# Altium PCB PCB-NW0101 Rev.D.PcbDoc (part 2 of 3)
Units mm, origin at the board's own origin, x right, y up, seen from the top; angles counter-clockwise.
Board outline 20 x 35 mm, 6 copper layers (Top, GND, Inner3, Inner4, PWR, Bottom), stack 0.74 mm thick; 118 components, 125 nets, 559 pads, 474 vias.
Unrouted connection lines stored in the file: 214.
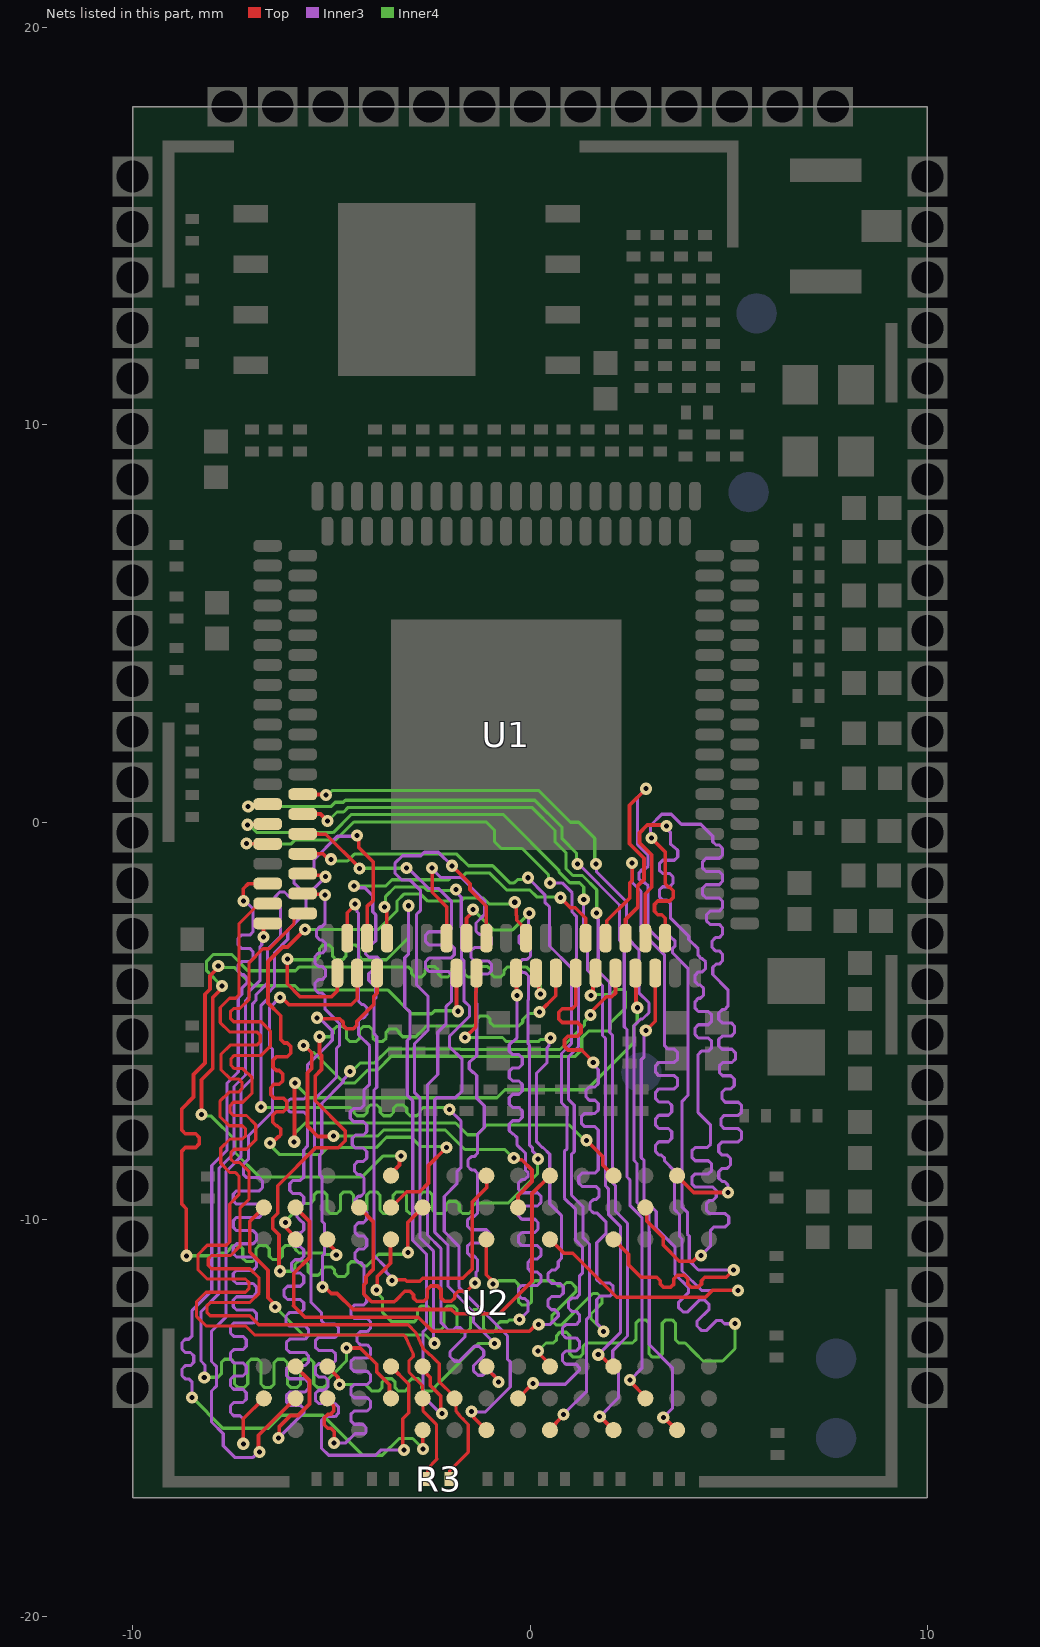
[diagram p6: the nets of this part, all layers, seen from the top]

## Via types
v1: diameter 0.305/0.305/0.305/0.305 (per signal layer), hole 0.127, Top to Bottom, tented both sides, 474 vias

## Nets (pads, with @x,y where several pads share a name; then routed paths per layer and width w, separated by ;. In a path a pad name is that pad's centre, name@x,y a point inside that pad or via, vN(x,y) a via of type N, cw(c..) or ccw(c..) an arc to the next point about the centre after c; other vN are vias at no path point) (continued)
DDR_A4: U1.82 U2.N8 | length 23
  Top w0.092: U2.N8@-5.1,-14.5 -5.1,-14.524 -5.1,-14.535 -4.939,-14.696 -4.939,-14.822 -5.022,-14.905 -5.092,-14.905 -5.178,-14.992 -5.178,-15.165 -5.092,-15.252 -5.011,-15.252 -4.924,-15.338 -4.924,-15.384 -4.924,-15.612 v1(-4.933,-15.621) ; U1.82@-4.6,-2.92 -4.6,-2.282 -4.402,-2.083 v1(-4.402,-2.068)
  Inner3 w0.079: v1(-4.933,-15.621) -4.633,-15.621 -4.405,-15.392 -4.166,-15.392 -4.126,-15.353 -4.126,-15.235 -4.209,-15.152 -4.426,-15.152 -4.509,-15.069 -4.509,-14.903 -4.426,-14.819 -4.099,-14.819 -4.016,-14.736 -4.016,-14.57 -4.099,-14.487 -4.426,-14.487 -4.509,-14.403 -4.509,-14.237 -4.426,-14.154 -4.099,-14.154 -4.016,-14.071 -4.016,-13.904 -4.099,-13.821 -4.426,-13.821 -4.509,-13.738 -4.509,-13.571 -4.426,-13.488 -4.099,-13.488 -4.016,-13.405 -4.016,-13.239 -4.099,-13.155 -4.272,-13.155 -4.355,-13.072 -4.355,-12.906 -4.272,-12.823 -4.099,-12.823 -4.016,-12.74 -4.016,-12.573 -4.099,-12.49 -4.426,-12.49 -4.509,-12.407 -4.509,-12.24 -4.426,-12.157 -4.191,-12.157 -4.108,-12.074 -4.108,-11.963 -4.18,-11.892 -4.18,-11.203 -4.18,-11.163 -4.263,-11.08 -4.319,-11.08 -4.403,-10.997 -4.403,-10.831 -4.319,-10.747 -4.191,-10.747 -4.108,-10.664 -4.108,-10.498 -4.191,-10.415 -4.319,-10.415 -4.403,-10.331 -4.403,-10.165 -4.319,-10.082 -4.191,-10.082 -4.108,-9.999 -4.108,-9.832 -4.191,-9.749 -4.319,-9.749 -4.403,-9.666 -4.403,-9.499 -4.319,-9.416 -4.263,-9.416 -4.18,-9.333 -4.18,-9.1 -4.18,-8.995 -4.18,-8.956 -4.263,-8.872 -4.334,-8.872 -4.417,-8.789 -4.417,-8.623 -4.334,-8.54 -4.191,-8.54 -4.108,-8.456 -4.108,-8.29 -4.191,-8.207 -4.392,-8.207 -4.475,-8.124 -4.475,-7.957 -4.392,-7.874 -4.191,-7.874 -4.108,-7.791 -4.108,-7.625 -4.191,-7.541 -4.44,-7.541 -4.524,-7.458 -4.524,-7.292 -4.44,-7.209 -4.263,-7.209 -4.18,-7.125 -4.18,-6.898 -4.18,-6.74 -4.038,-6.598 -4.038,-5.631 -4.29,-5.379 -4.317,-5.352 -4.317,-5.007 -4.234,-4.924 -4.187,-4.924 -4.104,-4.841 -4.104,-4.674 -4.187,-4.591 -4.234,-4.591 -4.317,-4.508 -4.317,-3.356 -4.317,-2.288 -4.359,-2.247 -4.359,-2.111 v1(-4.402,-2.068)
DDR_A5: U1.93 U2.N3 | length 21.6
  Top w0.092: v1(-8.649,-10.915) -8.649,-9.73 -8.76,-9.618 -8.76,-8.669 -8.76,-8.276 -8.674,-8.19 -8.414,-8.19 -8.327,-8.103 -8.327,-7.93 -8.414,-7.843 -8.674,-7.843 -8.76,-7.757 -8.76,-7.579 -8.76,-7.213 -8.469,-6.922 -8.469,-6.353 -8.177,-6.062 -8.177,-4.336 -8.052,-4.211 -8.052,-3.866 -7.845,-3.659 v1(-7.845,-3.624) ; U2.N3@-5.082,-10.49 -5.082,-10.603 -4.917,-10.768 -4.917,-10.859 v1(-4.876,-10.9) ; U1.93@-1.85,-3.8 -1.85,-4.729 v1(-1.817,-4.762)
  Inner4 w0.078: v1(-8.649,-10.915) -7.892,-10.915 -7.823,-10.846 -7.683,-10.846 -7.644,-10.846 -7.56,-10.763 -7.56,-10.737 -7.477,-10.654 -7.311,-10.654 -7.228,-10.737 -7.228,-10.975 -7.145,-11.058 -6.979,-11.058 -6.896,-10.975 -6.896,-10.737 -6.813,-10.654 -6.646,-10.654 -6.563,-10.737 -6.563,-10.927 -6.48,-11.01 -6.314,-11.01 -6.231,-10.927 -6.231,-10.737 -6.148,-10.654 -5.982,-10.654 -5.898,-10.737 -5.898,-10.763 -5.815,-10.846 -5.773,-10.846 -5.186,-10.846 -5.146,-10.885 -4.891,-10.885 v1(-4.876,-10.9) ; v1(-7.845,-3.624) -7.811,-3.658 -7.439,-3.658 -6.976,-4.12 -5.913,-4.12 -5.803,-4.231 -3.57,-4.231 -3.276,-4.525 -3.276,-4.531 -2.981,-4.825 -2.475,-4.825 -2.398,-4.748 -1.831,-4.748 v1(-1.817,-4.762)
DDR_A6: U1.86 U2.N7 | length 22
  Top w0.092: U2.N7@-5.095,-13.706 -5.094,-13.706 -4.831,-13.969 -4.831,-14.113 v1(-4.79,-14.154) ; v1(-3.665,-2.14) -3.665,-2.197 -3.607,-2.255 -3.607,-2.913 U1.86@-3.6,-2.92
  Inner3 w0.079: v1(-1.862,-1.698) -1.862,-1.759 -1.73,-1.891 -1.73,-2.658 -1.727,-2.661 -1.727,-3.428 -1.665,-3.49 -1.665,-4.499 -1.524,-4.64 -1.524,-4.891 -2.03,-5.397 -2.03,-5.648 -1.709,-5.97 -1.709,-6.77 -1.878,-6.939 -2.35,-6.939 -2.399,-6.988 -2.399,-10.318 -2.065,-10.653 -2.065,-11.685 -1.422,-12.327 -1.422,-12.589 v1(-0.889,-13.123)
  Inner4 w0.078: v1(-4.79,-14.154) -4.514,-14.154 -4.142,-14.154 -4.059,-14.237 ; -4.059,-14.238 -3.976,-14.321 -3.81,-14.321 -3.727,-14.238 -3.727,-14.093 -3.644,-14.01 -3.478,-14.01 -3.394,-14.093 -3.394,-14.238 -3.311,-14.321 -3.145,-14.321 -3.062,-14.238 -3.062,-14.093 -2.979,-14.01 -2.813,-14.01 -2.73,-14.093 -2.73,-14.238 -2.647,-14.321 -2.48,-14.321 -2.397,-14.238 -2.397,-14.216 -2.213,-14.032 -1.304,-13.123 v1(-0.889,-13.123) ; v1(-3.665,-2.14) -3.635,-2.109 -3.635,-1.87 -3.399,-1.634 -2.673,-1.634 -2.583,-1.724 -1.888,-1.724 v1(-1.862,-1.698)
DDR_A7: U1.95 U2.P2 | length 22.2
  Top w0.092: -5.951,-12.174 -5.663,-12.462 -2.81,-12.462 -2.456,-12.816 -0.016,-12.816 0.16,-12.64 v1(0.218,-12.64) ; -5.944,-12.167 -5.944,-11.352 -5.549,-10.957 -5.549,-10.051 U2.P2@-5.9,-9.7 ; v1(-1.634,-5.424) -1.366,-5.155 -1.366,-4.267 -1.35,-4.251 U1.95@-1.35,-3.8
  Inner3 w0.079: v1(0.218,-12.64) 0.508,-12.64 0.71,-12.437 0.71,-12.395 0.71,-12.356 0.627,-12.273 0.539,-12.273 0.456,-12.19 0.456,-12.023 0.539,-11.94 0.753,-11.94 0.836,-11.857 0.836,-11.69 0.753,-11.607 0.539,-11.607 0.456,-11.524 0.456,-11.358 0.539,-11.274 0.627,-11.274 0.71,-11.191 0.71,-11.15 0.71,-11.062 0.787,-10.984 0.787,-9.898 0.497,-9.608 0.497,-8.361 0.325,-8.189 0.305,-8.189 0.165,-8.049 0.165,-6.316 0.43,-6.05 0.43,-5.676 0.473,-5.634 0.473,-5.474 v1(0.516,-5.431)
  Inner4 w0.078: v1(-1.634,-5.424) -0.694,-5.424 -0.592,-5.526 0.207,-5.526 0.259,-5.474 0.473,-5.474 v1(0.516,-5.431)
DDR_A8: U1.84 U2.P8 | length 24
  Top w0.092: v1(-6.809,-15.854) -6.833,-15.831 -6.833,-15.433 -5.918,-14.518 U2.P8@-5.918,-14.478 ; v1(-4.353,-0.335) -4.313,-0.376 -4.313,-0.64 -3.946,-1.007 -3.946,-1.973 -4.1,-2.127 U1.84@-4.1,-2.92
  Inner3 w0.079: v1(-6.809,-15.854) -6.836,-15.854 -6.968,-15.986 -7.433,-15.986 -7.72,-15.699 -7.72,-15.392 -8.015,-15.097 -8.015,-14.316 -7.885,-14.187 -7.885,-13.703 -8.015,-13.573 -8.015,-12.812 -7.648,-12.445 -7.648,-8.793 -7.268,-8.414 -7.268,-6.729 -6.98,-6.44 -6.98,-4.571 -6.895,-4.486 -6.895,-4.345 -6.61,-4.06 -6.61,-3.208 -6.277,-2.875 -6.277,-2.308 -6.277,-2.134 -6.414,-1.997 -6.414,-1.88 -6.297,-1.762 -6.179,-1.762 -6.049,-1.892 -5.932,-1.892 -5.814,-1.774 -5.814,-1.657 -5.944,-1.527 -5.944,-1.409 -5.826,-1.291 -5.709,-1.291 -5.604,-1.396 -5.486,-1.396 -5.436,-1.346 -5.436,-0.946 -4.848,-0.359 -4.377,-0.359 v1(-4.353,-0.335)
DDR_A9: U1.94 U2.P3 | length 21.9
  Top w0.092: -6.118,-10.234 -5.918,-10.434 U2.P3@-5.918,-10.49 ; U1.94@-1.6,-2.92 -1.6,-2.422 -1.437,-2.258 v1(-1.437,-2.205)
  Inner3 w0.079: v1(-0.02,-2.295) -0.039,-2.314 -0.039,-2.591 -0.039,-2.708 -0.122,-2.792 -0.187,-2.792 -0.27,-2.875 -0.27,-3.041 -0.187,-3.124 -0.073,-3.124 0.01,-3.208 0.01,-3.374 -0.073,-3.457 -0.187,-3.457 -0.27,-3.54 -0.27,-3.707 -0.187,-3.79 -0.122,-3.79 -0.039,-3.873 -0.039,-3.913 -0.039,-4.482 -0.056,-4.499 -0.056,-5.566 -0.016,-5.606 -0.016,-8.124 0.065,-8.205 0.065,-8.283 0.203,-8.421 v1(0.203,-8.483)
  Inner4 w0.078: v1(-6.158,-10.079) -6.158,-10.044 -5.709,-9.595 -5.561,-9.595 -5.522,-9.595 -5.439,-9.512 -5.439,-9.389 -5.356,-9.306 -5.189,-9.306 -5.106,-9.389 -5.106,-9.766 -5.023,-9.849 -4.857,-9.849 -4.774,-9.766 -4.774,-9.389 -4.691,-9.306 -4.525,-9.306 -4.442,-9.389 -4.442,-9.766 -4.358,-9.849 -4.192,-9.849 -4.109,-9.766 -4.109,-9.389 -4.026,-9.306 -3.86,-9.306 -3.777,-9.389 -3.777,-9.766 -3.694,-9.849 -3.527,-9.849 -3.444,-9.766 -3.444,-9.389 -3.361,-9.306 -3.195,-9.306 -3.112,-9.389 -3.112,-9.766 -3.029,-9.849 -2.863,-9.849 -2.78,-9.766 -2.78,-9.389 -2.696,-9.306 -2.53,-9.306 -2.447,-9.389 -2.447,-9.766 -2.364,-9.849 -2.198,-9.849 -2.115,-9.766 -2.115,-9.624 -2.032,-9.541 -1.865,-9.541 -1.782,-9.624 -1.782,-9.766 -1.699,-9.849 -1.533,-9.849 -1.45,-9.766 -1.45,-9.672 -1.367,-9.589 -0.598,-9.587 -0.558,-9.587 -0.55,-9.587 0.188,-8.849 0.188,-8.498 v1(0.203,-8.483) ; v1(-1.437,-2.205) -1.433,-2.205 -0.926,-2.713 -0.438,-2.713 v1(-0.02,-2.295)
DDR_A10: U1.92 U2.M2 | length 22.9
  Top w0.092: U2.M2@-4.216,-9.728 -4.216,-9.784 -3.949,-10.051 -3.949,-11.262 -4.128,-11.441 -4.128,-11.59 -4.186,-11.649 -4.186,-11.874 -3.987,-12.074 -3.417,-12.074 -3.375,-12.031 -3.15,-11.806 -3.021,-11.806 -2.934,-11.893 -2.934,-11.974 -2.847,-12.06 -2.674,-12.06 -2.588,-11.974 -2.588,-11.761 -2.501,-11.675 -2.328,-11.675 -2.241,-11.761 -2.241,-11.974 -2.155,-12.06 -1.982,-12.06 -1.895,-11.974 -1.895,-11.893 -1.809,-11.806 -1.762,-11.806 -1.592,-11.806 v1(-1.386,-11.601) ; v1(-2.464,-1.161) -2.464,-1.768 -2.1,-2.131 U1.92@-2.1,-2.92
  Inner3 w0.079: v1(-2.464,-1.161) -2.464,-1.174 -2.243,-1.395 -1.732,-1.395 -1.14,-1.986 -1.14,-2.324 -1.359,-2.542 -1.359,-2.604 -1.359,-2.744 -1.276,-2.828 -1.055,-2.828 -0.972,-2.911 -0.972,-3.077 -1.055,-3.16 -1.401,-3.16 -1.484,-3.244 -1.484,-3.41 -1.401,-3.493 -1.055,-3.493 -0.972,-3.576 -0.972,-3.743 -1.055,-3.826 -1.276,-3.826 -1.359,-3.909 -1.359,-4.281 -1.359,-4.55 -1.341,-4.568 -1.341,-5.691 -1.341,-5.88 -1.424,-5.963 -1.445,-5.963 -1.528,-6.046 -1.528,-6.213 -1.445,-6.296 -1.424,-6.296 -1.341,-6.379 -1.341,-6.419 -1.341,-6.951 -1.153,-7.138 -1.153,-7.688 -1.322,-7.856 -1.322,-7.976 -1.322,-8.335 -1.405,-8.419 -1.477,-8.419 -1.56,-8.502 -1.56,-8.668 -1.477,-8.751 -1.405,-8.751 -1.322,-8.835 -1.322,-8.874 -1.322,-9.505 -1.322,-9.844 -1.405,-9.927 -1.487,-9.927 -1.571,-10.011 -1.571,-10.177 -1.487,-10.26 -1.094,-10.26 -1.011,-10.343 -1.011,-10.51 -1.094,-10.593 -1.492,-10.593 -1.576,-10.676 -1.576,-10.842 -1.492,-10.926 -1.405,-10.926 -1.322,-11.009 -1.322,-11.048 -1.322,-11.291 -1.361,-11.33 -1.361,-11.575 v1(-1.386,-11.601)
DDR_A11: U1.85 U2.P7 | length 23
  Top w0.092: v1(-6.332,-15.501) -6.307,-15.476 -6.307,-15.211 -6.03,-14.934 -5.838,-14.934 -5.549,-14.645 -5.549,-14.051 U2.P7@-5.918,-13.682 ; v1(-5.357,-4.926) -5.335,-4.948 -5.183,-4.948 -4.791,-4.948 -4.704,-5.035 -4.704,-5.116 -4.618,-5.202 -4.444,-5.202 -4.358,-5.116 -4.358,-5.018 -4.039,-4.7 -3.931,-4.591 -3.931,-4.39 -3.85,-4.31 U1.85@-3.85,-3.8
  Inner3 w0.079: v1(-6.332,-15.501) -5.695,-14.864 -5.695,-14.798 -5.695,-14.758 -5.778,-14.675 -6.047,-14.675 -6.131,-14.592 -6.131,-14.425 -6.047,-14.342 -5.66,-14.342 -5.577,-14.259 -5.577,-14.093 -5.66,-14.009 -6.047,-14.009 -6.131,-13.926 -6.131,-13.76 -6.047,-13.677 -5.66,-13.677 -5.577,-13.593 -5.577,-13.427 -5.66,-13.344 -6.047,-13.344 -6.131,-13.261 -6.131,-13.094 -6.047,-13.011 -5.66,-13.011 -5.577,-12.928 -5.577,-12.762 -5.66,-12.678 -6.057,-12.678 -6.141,-12.595 -6.141,-12.429 -6.057,-12.346 -5.778,-12.346 -5.695,-12.262 -5.695,-12.096 -5.778,-12.013 -6.104,-12.013 -6.187,-11.93 -6.187,-11.763 -6.104,-11.68 -5.778,-11.68 -5.695,-11.597 -5.695,-11.43 -5.778,-11.347 -5.915,-11.347 -5.998,-11.264 -5.998,-11.098 -5.915,-11.014 -5.778,-11.014 -5.695,-10.931 -5.695,-10.765 -5.778,-10.682 -5.93,-10.682 -6.013,-10.598 -6.013,-10.432 -5.93,-10.349 -5.778,-10.349 -5.695,-10.266 -5.695,-10.099 -5.778,-10.016 -5.782,-10.016 -5.865,-9.933 -5.865,-9.766 -5.782,-9.683 -5.778,-9.683 -5.695,-9.6 -5.695,-9.434 -5.778,-9.351 -5.964,-9.351 -6.047,-9.267 -6.047,-9.101 -5.964,-9.018 -5.778,-9.018 -5.695,-8.935 -5.695,-8.411 -5.695,-8.251 -5.603,-8.159 -5.603,-8.089 -5.603,-7.384 -5.686,-7.301 -6.031,-7.301 -6.114,-7.218 -6.114,-7.051 -6.031,-6.968 -5.686,-6.968 -5.603,-6.885 -5.603,-6.609 -5.603,-6.122 -5.028,-5.547 -5.028,-5.544 -4.977,-5.493 -4.977,-5.256 -5.308,-4.926 v1(-5.357,-4.926)
DDR_A12: U1.96 U2.R2 | length 24.1
  Top w0.092: U2.R2@-6.706,-9.703 -6.706,-9.706 -7.051,-10.051 -7.051,-10.818 -6.592,-11.278 -6.592,-11.97 -6.412,-12.15 v1(-6.412,-12.202) ; v1(-1.965,-1.101) -1.512,-1.554 -1.512,-1.705 -1.1,-2.117 U1.96@-1.1,-2.92
  Inner3 w0.079: v1(-2.402,-13.116) -2.425,-13.093 -2.425,-10.802 -2.772,-10.456 -2.772,-6.941 -2.91,-6.803 -2.91,-5.585 -2.567,-5.242 -2.567,-4.385 -2.856,-4.095 -2.856,-2.325 -2.761,-2.229 -2.761,-1.716 -3.015,-1.461 -3.221,-1.461 -3.4,-1.282 -3.4,-1.039 -3.211,-0.85 -2.747,-0.85 -2.658,-0.761 -2.306,-0.761 v1(-1.965,-1.101)
  Inner4 w0.078: v1(-6.412,-12.202) -5.708,-12.907 -2.63,-12.907 -2.42,-13.116 v1(-2.402,-13.116)
DDR_A13: U1.83 U2.R8 | length 24
  Top w0.092: v1(-7.216,-15.645) -7.214,-15.643 -7.214,-15.014 U2.R8@-6.703,-14.503 ; v1(-6.294,-4.414) -6.25,-4.414 -6.066,-4.597 -4.497,-4.597 -4.35,-4.45 U1.83@-4.35,-3.8
  Inner3 w0.079: v1(-7.216,-15.645) -7.214,-15.643 -7.214,-15.062 -7.214,-15.023 -7.297,-14.939 -7.455,-14.939 -7.538,-14.856 -7.538,-14.69 -7.455,-14.607 -7.223,-14.607 -7.14,-14.523 -7.14,-14.357 -7.223,-14.274 -7.455,-14.274 -7.538,-14.191 -7.538,-14.024 -7.455,-13.941 -7.223,-13.941 -7.14,-13.858 -7.14,-13.691 -7.223,-13.608 -7.455,-13.608 -7.538,-13.525 -7.538,-13.359 -7.455,-13.275 -7.223,-13.275 -7.14,-13.192 -7.14,-13.026 -7.223,-12.943 -7.455,-12.943 -7.538,-12.859 -7.538,-12.693 -7.455,-12.61 -6.969,-12.61 -6.886,-12.527 -6.886,-12.36 -6.969,-12.277 -7.384,-12.277 -7.468,-12.194 -7.468,-12.028 -7.384,-11.944 -6.969,-11.944 -6.886,-11.861 -6.886,-11.695 -6.969,-11.612 -7.384,-11.612 -7.468,-11.528 -7.468,-11.362 -7.384,-11.279 -6.969,-11.279 -6.886,-11.196 -6.886,-11.029 -6.969,-10.946 -7.384,-10.946 -7.468,-10.863 -7.468,-10.696 -7.384,-10.613 -6.969,-10.613 -6.886,-10.53 -6.886,-10.364 -6.969,-10.28 -7.384,-10.28 -7.468,-10.197 -7.468,-10.031 -7.384,-9.948 -6.814,-9.948 -6.731,-9.864 -6.731,-9.698 -6.814,-9.615 -7.384,-9.615 -7.468,-9.532 -7.468,-9.365 -7.384,-9.282 -6.814,-9.282 -6.731,-9.199 -6.731,-9.033 -6.814,-8.949 -7.13,-8.949 -7.214,-8.866 -7.214,-8.661 -7.214,-8.614 -7.088,-8.488 -7.088,-7.901 -6.48,-7.293 -6.48,-5.711 -6.552,-5.639 -6.552,-4.671 v1(-6.294,-4.414)
DDR_BA0: U1.100 U2.L2 | length 21.7
  Top w0.092: v1(-6.547,-8.072) -6.49,-8.072 -6.341,-7.923 -6.328,-7.923 -6.274,-7.869 -6.274,-7.772 -6.274,-7.726 -6.36,-7.64 -6.386,-7.64 -6.473,-7.553 -6.473,-7.38 -6.386,-7.293 -6.209,-7.293 -6.122,-7.207 -6.122,-7.034 -6.209,-6.947 -6.441,-6.947 -6.528,-6.86 -6.528,-6.687 -6.441,-6.601 -6.309,-6.601 -6.222,-6.514 -6.222,-6.341 -6.309,-6.254 -6.379,-6.254 -6.466,-6.168 -6.466,-5.995 -6.379,-5.908 -6.106,-5.908 -6.02,-5.822 -6.02,-5.648 -6.106,-5.562 -6.187,-5.562 -6.274,-5.475 -6.274,-4.981 -6.274,-4.876 -6.594,-4.556 -6.594,-3.512 -6.225,-3.144 -6.103,-3.144 v1(-5.664,-2.704) ; U2.L2@-3.48,-9.68 -3.106,-9.306 -2.777,-9.306 -2.553,-9.082 -2.553,-8.642 v1(-2.106,-8.195) ; v1(-0.385,-2.019) -0.344,-2.06 -0.344,-2.349 -0.337,-2.356 -0.337,-2.473 -0.1,-2.71 U1.100@-0.1,-2.92
  Inner4 w0.078: v1(-6.547,-8.072) -6.547,-8.122 -6.3,-8.369 -5.282,-8.369 -5.105,-8.192 -3.872,-8.192 -3.612,-7.932 -2.992,-7.932 -2.762,-8.163 -2.137,-8.163 v1(-2.106,-8.195) ; v1(-5.664,-2.704) -3.815,-2.704 -3.347,-2.236 -3.347,-1.986 -3.175,-1.814 -2.747,-1.814 -2.57,-1.991 -1.74,-1.991 -1.658,-1.909 -1.182,-1.909 -1.029,-2.062 -0.428,-2.062 v1(-0.385,-2.019)
DDR_BA1: U1.99 U2.L3 | length 22.4
  Top w0.092: v1(-3.866,-11.771) -3.847,-11.751 -3.847,-11.434 -3.513,-11.1 -3.513,-10.523 U2.L3@-3.5,-10.51 ; U1.99@-0.35,-3.8 -0.3,-3.85 -0.341,-3.891 -0.341,-4.351 v1(-0.333,-4.36)
  Inner3 w0.079: v1(-0.333,-4.36) -0.333,-4.826 -0.333,-5.437 -0.416,-5.52 -0.439,-5.52 -0.522,-5.603 -0.522,-5.769 -0.439,-5.853 -0.279,-5.853 -0.196,-5.936 -0.196,-6.102 -0.279,-6.185 -0.439,-6.185 -0.522,-6.269 -0.522,-6.435 -0.439,-6.518 -0.279,-6.518 -0.196,-6.601 -0.196,-6.768 -0.279,-6.851 -0.439,-6.851 -0.522,-6.934 -0.522,-7.1 -0.439,-7.184 -0.279,-7.184 -0.196,-7.267 -0.196,-7.433 -0.279,-7.516 -0.439,-7.516 -0.522,-7.6 -0.522,-7.766 -0.439,-7.849 -0.416,-7.849 -0.333,-7.932 -0.333,-7.972 -0.333,-8.117 -0.115,-8.334 -0.115,-8.762 -0.049,-8.828 -0.049,-8.913 -0.132,-8.996 -0.207,-8.996 -0.29,-9.079 -0.29,-9.245 -0.207,-9.329 0.188,-9.329 0.271,-9.412 0.271,-9.578 0.188,-9.661 -0.207,-9.661 -0.29,-9.745 -0.29,-9.911 -0.207,-9.994 0.117,-9.994 0.201,-10.077 0.201,-10.244 0.117,-10.327 -0.207,-10.327 -0.29,-10.41 -0.29,-10.577 -0.207,-10.66 0.188,-10.66 0.271,-10.743 0.271,-10.909 0.188,-10.993 0.034,-10.993 -0.049,-11.076 -0.049,-11.242 0.034,-11.325 0.188,-11.325 0.271,-11.409 0.271,-11.575 0.188,-11.658 -0.207,-11.658 -0.29,-11.741 -0.29,-11.908 -0.207,-11.991 -0.132,-11.991 -0.049,-12.074 -0.049,-12.113 -0.049,-12.305 v1(-0.261,-12.516)
  Inner4 w0.078: v1(-3.866,-11.771) -3.866,-11.832 -3.708,-11.989 -3.708,-12.344 -3.692,-12.361 -3.48,-12.573 -2.914,-12.573 -2.831,-12.49 -2.831,-12.266 -2.748,-12.183 -2.582,-12.183 -2.498,-12.266 -2.498,-12.7 -2.415,-12.783 -2.249,-12.783 -2.166,-12.7 -2.166,-12.266 -2.083,-12.183 -1.917,-12.183 -1.834,-12.266 -1.834,-12.744 -1.751,-12.827 -1.584,-12.827 -1.501,-12.744 -1.501,-12.351 -1.418,-12.268 -1.252,-12.268 -1.169,-12.351 -1.169,-12.744 -1.086,-12.827 -0.92,-12.827 -0.837,-12.744 -0.837,-12.656 -0.753,-12.573 -0.714,-12.573 -0.57,-12.573 -0.531,-12.534 -0.278,-12.534 v1(-0.261,-12.516)
DDR_BA2: U1.101 U2.L1 | length 21.9
  Top w0.092: v1(-8.266,-7.357) -8.266,-6.484 -7.983,-6.201 -7.983,-4.417 -7.752,-4.185 v1(-7.752,-4.131) ; U2.L1@-3.48,-8.89 -3.48,-8.825 -3.286,-8.631 -3.286,-8.448 v1(-3.245,-8.407) ; U1.101@0.15,-3.8 0.218,-3.867 0.218,-4.225 0.26,-4.268 v1(0.26,-4.325)
  Inner4 w0.078: v1(-8.266,-7.357) -8.223,-7.401 -8.017,-7.401 -7.425,-7.993 -7.425,-8.317 -6.815,-8.928 -4.224,-8.928 -3.704,-8.407 v1(-3.245,-8.407) ; v1(-7.752,-4.131) -8.138,-3.745 -8.138,-3.502 -7.966,-3.33 -7.512,-3.33 -7.1,-3.742 -5.901,-3.742 -5.803,-3.645 -3.433,-3.645 -3.061,-3.645 -2.978,-3.728 -2.978,-3.815 -2.895,-3.899 -2.729,-3.899 -2.646,-3.815 -2.646,-3.721 -2.563,-3.638 -2.396,-3.638 -2.313,-3.721 -2.313,-3.815 -2.23,-3.899 -2.064,-3.899 -1.981,-3.815 -1.981,-3.721 -1.898,-3.638 -1.732,-3.638 -1.649,-3.721 -1.649,-3.815 -1.565,-3.899 -1.399,-3.899 -1.316,-3.815 -1.316,-3.721 -1.233,-3.638 -1.067,-3.638 -0.984,-3.721 -0.984,-3.815 -0.901,-3.899 -0.734,-3.899 -0.651,-3.815 -0.651,-3.728 -0.568,-3.645 -0.166,-3.645 -0.097,-3.645 0.26,-4.002 v1(0.26,-4.325)
DDR_CAS: U1.75 U2.L7 | length 23.4
  Top w0.092: U1.75@-5.72,-1.8 -5.703,-1.817 -5.173,-1.817 v1(-5.156,-1.833) ; U2.L7@-3.509,-13.691 -3.051,-14.149 -3.051,-14.865 -3.2,-15.014 -3.2,-15.773 v1(-3.17,-15.804)
  Inner3 w0.079: v1(-5.156,-1.833) -5.156,-2.032 -5.156,-2.552 -5.239,-2.635 -5.288,-2.635 -5.371,-2.718 -5.371,-2.885 -5.288,-2.968 -5.231,-2.968 -5.148,-3.051 -5.148,-3.217 -5.231,-3.301 -5.327,-3.301 -5.41,-3.384 -5.41,-3.55 -5.327,-3.633 -5.231,-3.633 -5.148,-3.716 -5.148,-3.883 -5.231,-3.966 -5.327,-3.966 -5.41,-4.049 -5.41,-4.216 -5.327,-4.299 -5.239,-4.299 -5.156,-4.382 -5.156,-4.712 -4.864,-5.004 -4.797,-5.071 -4.797,-5.624 -4.869,-5.696 -4.869,-6.418 -5.422,-6.972 -5.422,-8.234 -5.514,-8.326 -5.514,-12.077 -5.246,-12.344 -5.246,-12.55 -5.163,-12.633 -4.905,-12.633 -4.822,-12.716 -4.822,-12.883 -4.905,-12.966 -5.318,-12.966 -5.401,-13.049 -5.401,-13.215 -5.318,-13.299 -4.974,-13.299 -4.891,-13.382 -4.891,-13.548 -4.974,-13.631 -5.318,-13.631 -5.401,-13.715 -5.401,-13.881 -5.318,-13.964 -5.167,-13.964 -5.084,-14.047 -5.084,-14.214 -5.167,-14.297 -5.318,-14.297 -5.401,-14.38 -5.401,-14.546 -5.318,-14.63 -4.905,-14.63 -4.822,-14.713 -4.822,-14.879 -4.905,-14.962 -5.163,-14.962 -5.246,-15.046 -5.246,-15.418 -5.246,-15.757 -5.069,-15.934 -3.888,-15.934 -3.758,-15.804 v1(-3.17,-15.804)
DDR_CKE: U1.103 U2.K2 | length 21.6
  Top w0.092: v1(-6.292,-11.303) -6.317,-11.278 -6.317,-10.387 -6.349,-10.355 -6.477,-10.227 -6.477,-9.973 -6.349,-9.845 -6.349,-9.149 -5.399,-8.199 -4.824,-8.199 -4.648,-8.023 -4.648,-7.774 -5.406,-7.017 -5.406,-6.389 -5.246,-6.228 -5.246,-5.87 -5.297,-5.818 v1(-5.297,-5.402) ; v1(-3.075,-10.835) -3.073,-10.833 -3.073,-10.073 -2.769,-9.769 U2.K2@-2.769,-9.754 ; v1(0.237,-4.782) 0.65,-4.369 U1.103@0.65,-3.8
  Inner4 w0.078: v1(-6.292,-11.303) -6.037,-11.303 -5.997,-11.303 -5.914,-11.22 -5.914,-11.132 -5.831,-11.049 -5.665,-11.049 -5.582,-11.132 -5.582,-11.322 -5.499,-11.405 -5.333,-11.405 -5.25,-11.322 -5.25,-11.276 -5.166,-11.193 -5,-11.193 -4.917,-11.276 -4.917,-11.356 -4.834,-11.439 -4.668,-11.439 -4.585,-11.356 -4.585,-11.148 -4.502,-11.065 -4.335,-11.065 -4.228,-11.173 -4.11,-11.173 -3.975,-11.037 -3.813,-10.876 -3.117,-10.876 v1(-3.075,-10.835) ; v1(-5.297,-5.402) -5.074,-5.402 -5.035,-5.402 -4.952,-5.319 -4.952,-5.231 -4.869,-5.148 -4.703,-5.148 -4.62,-5.231 -4.62,-5.441 -4.537,-5.524 -4.37,-5.524 -4.287,-5.441 -4.287,-5.231 -4.204,-5.148 -4.038,-5.148 -3.955,-5.231 -3.955,-5.437 -3.872,-5.52 -3.706,-5.52 -3.623,-5.437 -3.623,-5.287 -3.539,-5.204 -3.373,-5.204 -3.29,-5.287 -3.29,-5.319 -3.207,-5.402 -2.875,-5.402 -2.681,-5.208 -2.604,-5.131 -1.458,-5.131 -1.419,-5.131 -1.336,-5.047 -1.336,-4.96 -1.252,-4.877 -1.086,-4.877 -1.003,-4.96 -1.003,-5.047 -0.92,-5.131 -0.279,-5.131 -0.187,-5.038 -0.185,-5.036 -0.185,-4.97 -0.033,-4.817 0.202,-4.817 v1(0.237,-4.782)
DDR_CLK_N: R3.1 U1.76 U2.K8 | length 27.1
  Top w0.079: U1.76@-6.6,-2.05 -6.81,-2.05 -7.326,-2.566 -7.326,-3.646 -7.326,-4.351 -7.41,-4.435 -7.562,-4.435 -7.796,-4.668 -7.796,-5.048 -7.562,-5.282 -6.873,-5.282 -6.79,-5.365 -6.79,-5.532 -6.873,-5.615 -7.546,-5.615 -7.78,-5.849 -7.78,-6.228 -7.546,-6.462 -7.333,-6.462 -7.25,-6.546 -7.25,-6.712 -7.333,-6.795 -7.571,-6.795 -7.805,-7.029 -7.805,-7.409 -7.571,-7.643 -7.241,-7.643 -7.157,-7.726 -7.157,-7.893 -7.241,-7.976 -7.55,-7.976 -7.784,-8.21 -7.784,-8.589 -7.55,-8.823 -7.41,-8.823 -7.326,-8.906 -7.326,-9.381 -7.557,-9.611 -7.557,-9.879 -7.557,-9.881 -7.557,-10.568 -7.64,-10.651 -8.121,-10.651 -8.355,-10.885 -8.355,-11.264 -8.121,-11.498 -7.158,-11.498 -7.075,-11.581 -7.075,-11.748 -7.158,-11.831 -8.155,-11.831 -8.389,-12.065 -8.389,-12.445 -8.155,-12.679 -7.159,-12.679 -7.119,-12.718 -6.931,-12.906 -6.617,-12.906 -3.175,-12.906 -3.129,-12.953 -2.938,-13.386 -2.938,-13.451 -2.961,-13.474 -3.044,-13.557 -3.044,-13.843 -2.709,-14.178 -2.709,-14.491 U2.K8@-2.7,-14.5 -2.691,-14.509 -2.691,-14.822 -2.356,-15.157 -2.356,-16.009 -2.337,-16.027 -2.36,-16.051 -2.575,-16.266 R3.1@-2.575,-16.583
DDR_CLK_P: R3.2 U1.77 U2.J8 | length 27.3
  Top w0.079: U1.77@-5.72,-2.3 -5.838,-2.3 -5.943,-2.405 -5.943,-2.569 -6.565,-3.19 -6.722,-3.19 -7.069,-3.537 -7.069,-3.646 -7.069,-4.458 -7.303,-4.692 -7.456,-4.692 -7.539,-4.775 -7.539,-4.942 -7.456,-5.025 -6.767,-5.025 -6.533,-5.259 -6.533,-5.638 -6.767,-5.872 -7.44,-5.872 -7.523,-5.955 -7.523,-6.122 -7.44,-6.205 -7.226,-6.205 -6.993,-6.439 -6.993,-6.819 -7.226,-7.052 -7.464,-7.052 -7.548,-7.136 -7.548,-7.302 -7.464,-7.386 -7.134,-7.386 -6.9,-7.62 -6.9,-7.999 -7.134,-8.233 -7.444,-8.233 -7.527,-8.316 -7.527,-8.483 -7.444,-8.566 -7.303,-8.566 -7.069,-8.8 -7.069,-9.487 -7.3,-9.718 -7.3,-9.879 -7.3,-9.881 -7.3,-10.674 -7.534,-10.908 -8.015,-10.908 -8.098,-10.991 -8.098,-11.158 -8.015,-11.241 -7.052,-11.241 -6.818,-11.475 -6.818,-11.855 -7.052,-12.088 -8.049,-12.088 -8.132,-12.172 -8.132,-12.338 -8.049,-12.422 -7.052,-12.422 -6.825,-12.649 -6.739,-12.649 -6.617,-12.649 -3.175,-12.649 -3.069,-12.649 -2.872,-12.846 -2.696,-13.238 -2.537,-13.397 cw(c-2.7,-13.7) -2.458,-13.455 -2.332,-13.579 -2.286,-13.625 -2.286,-14.08 U2.J8@-1.926,-14.44 ; R3.2@-2.025,-16.6 -2.025,-16.325 -1.556,-15.856 -1.556,-15.16 -1.654,-15.059 ccw(c-1.9,-15.3) -1.672,-15.042 -1.763,-14.95 -1.863,-14.822 -1.863,-14.789 -1.863,-14.537 U2.J8@-1.9,-14.5
DDR_CS: U1.78 U2.L8 | length 22.9
  Top w0.092: v1(-6.706,-2.889) -6.706,-2.649 -6.607,-2.55 U1.78@-6.6,-2.55 ; v1(-4.623,-13.233) -4.27,-13.233 -3.857,-13.646 -3.857,-13.839 -3.538,-14.158 -3.538,-14.42 U2.L8@-3.505,-14.453
  Inner3 w0.079: v1(-8.198,-13.975) -8.178,-13.955 -8.178,-13.665 -8.28,-13.563 -8.28,-12.319 -7.828,-11.867 -7.828,-8.718 -7.449,-8.339 -7.449,-6.654 -7.16,-6.366 -7.16,-4.496 -7.075,-4.411 -7.075,-4.27 -6.791,-3.985 -6.791,-3.133 -6.749,-3.092 -6.749,-2.932 v1(-6.706,-2.889)
  Inner4 w0.078: v1(-8.198,-13.975) -8.192,-13.97 -7.89,-13.97 -7.851,-13.97 -7.768,-13.887 -7.768,-13.601 -7.685,-13.517 -7.519,-13.517 -7.436,-13.601 -7.436,-14.141 -7.353,-14.224 -7.186,-14.224 -7.103,-14.141 -7.103,-13.601 -7.02,-13.517 -6.854,-13.517 -6.771,-13.601 -6.771,-14.141 -6.688,-14.224 -6.522,-14.224 -6.438,-14.141 -6.438,-13.601 -6.355,-13.517 -6.189,-13.517 -6.106,-13.601 -6.106,-14.141 -6.023,-14.224 -5.857,-14.224 -5.774,-14.141 -5.774,-13.601 -5.691,-13.517 -5.524,-13.517 -5.441,-13.601 -5.441,-14.141 -5.358,-14.224 -5.192,-14.224 -5.109,-14.141 -5.109,-14.05 -4.877,-13.818 -4.623,-13.564 v1(-4.623,-13.233)
DDR_D0: U1.71 U2.G8 | length 23
  Top w0.092: U1.71@-5.72,-0.8 -5.209,-0.8 -5.07,-0.938 v1(-5.013,-0.938) ; U2.G8@-0.3,-14.5 0.076,-14.124 v1(0.076,-14.122)
  Inner3 w0.079: v1(-0.051,-1.402) 0.373,-1.827 0.373,-2.019 0.491,-2.136 0.491,-3.12 1.04,-3.669 1.04,-5.576 0.791,-5.826 0.791,-7.061 0.854,-7.124 0.932,-7.202 0.932,-8.218 0.864,-8.286 0.864,-9.463 1.148,-9.748 1.148,-10.524 1.317,-10.692 1.317,-11.355 1.242,-11.43 1.242,-11.897 1.159,-11.98 1.051,-11.98 0.968,-12.064 0.968,-12.23 1.051,-12.313 1.159,-12.313 1.242,-12.396 1.242,-12.563 1.159,-12.646 0.901,-12.646 0.817,-12.729 0.817,-12.895 0.901,-12.979 1.159,-12.979 1.242,-13.062 1.242,-13.228 1.159,-13.311 0.901,-13.311 0.817,-13.395 0.817,-13.561 0.901,-13.644 1.159,-13.644 1.242,-13.727 1.242,-13.767 1.242,-13.795 0.889,-14.148 0.102,-14.148 v1(0.076,-14.122) v1@0.051,-14.097
  Inner4 w0.078: v1(-5.013,-0.938) -4.971,-0.98 -4.591,-0.98 -4.419,-0.808 -1.843,-0.808 -1.549,-1.102 -0.941,-1.102 -0.51,-1.532 -0.399,-1.532 -0.313,-1.445 -0.095,-1.445 v1(-0.051,-1.402)
DDR_D1: U1.107 U2.G2 | length 20.9
  Top w0.092: v1(-5.699,-5.62) -5.682,-5.62 -5.496,-5.807 -5.496,-6.204 -5.6,-6.308 -5.6,-7.651 -5.34,-7.911 -4.961,-7.911 v1(-4.949,-7.899) ; v1(-0.409,-8.456) -0.368,-8.497 -0.207,-8.497 0.051,-8.755 0.051,-9.045 -0.305,-9.401 U2.G2@-0.305,-9.525 ; v1(1.528,-4.364) 1.528,-4.307 1.582,-4.252 1.582,-3.867 U1.107@1.65,-3.8
  Inner4 w0.078: v1(-5.699,-5.62) -5.676,-5.62 -5.497,-5.799 -5.441,-5.799 -4.676,-6.565 -4.407,-6.565 -4.081,-6.239 -3.832,-6.239 -3.489,-5.895 -1.832,-5.895 -1.823,-5.904 1.127,-5.904 1.302,-5.729 1.302,-5.431 1.474,-5.259 1.977,-5.259 2.023,-5.213 2.023,-5.054 2.405,-4.672 2.405,-4.277 2.343,-4.215 2.154,-4.215 2.025,-4.343 1.549,-4.343 v1(1.528,-4.364) ; v1(-4.949,-7.899) -3.833,-7.899 -3.687,-7.752 -2.127,-7.752 -1.641,-8.238 -0.635,-8.238 -0.417,-8.456 v1(-0.409,-8.456)
DDR_D2: U1.69 U2.H7 | length 22.4
  Top w0.092: U1.69@-5.72,-0.3 -5.716,-0.295 -5.334,-0.295 ; -5.334,-0.305 -5.14,-0.305 -4.294,-1.152 v1(-4.294,-1.167) ; U2.H7@-1.1,-13.7 -1.1,-13.742 -0.793,-14.049 v1(-0.793,-14.09)
  Inner3 w0.079: v1(-3.107,-1.161) -3.06,-1.161 -2.544,-1.677 -2.297,-1.677 -1.972,-2.002 -1.972,-2.304 -1.972,-2.676 -2.055,-2.76 -2.546,-2.76 -2.629,-2.843 -2.629,-3.009 -2.546,-3.092 -1.991,-3.092 -1.908,-3.176 -1.908,-3.342 -1.991,-3.425 -2.546,-3.425 -2.629,-3.508 -2.629,-3.675 -2.546,-3.758 -2.055,-3.758 -1.972,-3.841 -1.972,-4.264 -1.972,-4.502 -2.111,-4.64 -2.111,-5.075 -2.323,-5.287 -2.323,-6.351 -2.579,-6.608 -2.579,-10.393 -2.245,-10.728 -2.245,-12.589 -2.21,-12.624 -2.182,-12.652 -2.052,-12.782 -1.934,-12.782 -1.872,-12.72 -1.755,-12.72 -1.637,-12.837 -1.637,-12.955 -2.014,-13.332 -2.014,-13.45 -1.896,-13.567 -1.779,-13.567 -1.402,-13.19 -1.284,-13.19 -1.166,-13.308 -1.166,-13.426 -1.427,-13.687 -1.427,-13.804 -1.31,-13.922 -1.192,-13.922 -1.111,-13.841 -0.993,-13.841 -0.965,-13.868 -0.793,-14.041 v1(-0.793,-14.09)
  Inner4 w0.078: v1(-4.294,-1.167) -4.29,-1.164 -3.11,-1.164 v1(-3.107,-1.161)
DDR_D3: U1.105 U2.H3 | length 22
  Top w0.092: U2.H3@-1.1,-10.5 -1.1,-11.394 -0.93,-11.564 v1(-0.93,-11.622) ; U1.105@1.15,-3.8 1.15,-3.936 1.15,-4.61 1.063,-4.697 0.808,-4.697 0.722,-4.784 0.722,-4.957 0.808,-5.043 1.195,-5.043 1.282,-5.13 1.282,-5.303 1.195,-5.39 0.953,-5.39 0.867,-5.476 0.867,-5.649 0.953,-5.736 1.296,-5.736 1.342,-5.782 1.591,-6.031 v1(1.591,-6.05)
  Inner3 w0.079: v1(1.591,-6.05) 1.591,-6.101 1.717,-6.227 1.717,-6.388 1.717,-6.584 1.634,-6.667 1.492,-6.667 1.409,-6.75 1.409,-6.916 1.492,-6.999 1.634,-6.999 1.717,-7.083 1.717,-7.249 1.634,-7.332 1.376,-7.332 1.293,-7.415 1.293,-7.582 1.376,-7.665 1.634,-7.665 1.717,-7.748 1.717,-7.788 1.717,-8.48 1.717,-8.752 1.634,-8.836 1.308,-8.836 1.225,-8.919 1.225,-9.085 1.308,-9.168 1.654,-9.168 1.737,-9.252 1.737,-9.418 1.654,-9.501 1.592,-9.501 1.509,-9.584 1.509,-9.751 1.592,-9.834 1.677,-9.834 1.8,-9.957 1.915,-10.072 1.915,-10.348 1.677,-10.586 1.677,-11.086 1.677,-11.515 1.761,-11.598 2.009,-11.598 2.092,-11.681 2.092,-11.847 2.009,-11.931 1.761,-11.931 1.677,-12.014 1.677,-12.386 1.677,-12.61 1.852,-12.785 v1(1.852,-12.817)
  Inner4 w0.078: v1(-0.93,-11.622) -0.868,-11.622 -0.791,-11.544 -0.749,-11.544 -0.377,-11.544 -0.294,-11.627 -0.294,-12.069 -0.211,-12.152 -0.045,-12.152 0.039,-12.069 0.039,-11.627 0.122,-11.544 0.579,-11.544 0.626,-11.591 0.683,-11.648 0.711,-11.676 0.828,-11.676 0.917,-11.587 1.034,-11.587 1.152,-11.705 1.152,-11.822 0.549,-12.425 0.549,-12.542 0.667,-12.66 0.784,-12.66 1.58,-11.864 1.698,-11.864 1.815,-11.981 1.815,-12.099 1.533,-12.381 1.533,-12.498 1.761,-12.726 v1(1.852,-12.817)
DDR_D4: U1.106 U2.H1 | length 22.9
  Top w0.092: v1(-3.476,-11.532) -3.46,-11.516 -3.139,-11.516 -3.097,-11.558 -2.775,-11.558 -2.699,-11.481 -1.691,-11.481 -1.451,-11.241 -1.451,-9.555 -1.092,-9.196 U2.H1@-1.092,-8.839 ; v1(0.764,-1.904) 1.016,-2.156 1.135,-2.156 1.4,-2.421 U1.106@1.4,-2.92
  Inner3 w0.079: v1(-4.426,-1.612) -4.383,-1.655 -4.158,-1.655 -3.959,-1.854 -3.959,-2.261 -3.883,-2.337 -3.883,-2.987 -3.966,-3.07 -4.054,-3.07 -4.137,-3.153 -4.137,-3.32 -4.054,-3.403 -3.84,-3.403 -3.756,-3.486 -3.756,-3.652 -3.84,-3.736 -3.976,-3.736 -4.06,-3.819 -4.06,-3.985 -3.976,-4.068 -3.966,-4.068 -3.883,-4.152 -3.883,-4.191 -3.883,-4.425 -3.924,-4.466 -3.924,-5.33 -3.857,-5.397 -3.857,-6.672 -3.928,-6.743 -3.928,-10.906 -3.63,-11.203 -3.63,-11.317 -3.476,-11.471 v1(-3.476,-11.532)
  Inner4 w0.078: v1(-4.426,-1.612) -3.631,-1.612 -3.473,-1.454 -2.047,-1.454 -1.988,-1.395 -1.73,-1.395 -1.621,-1.286 -1.011,-1.286 -0.585,-1.712 -0.005,-1.712 0.167,-1.884 0.744,-1.884 v1(0.764,-1.904)
DDR_D5: U1.73 U2.H9 | length 22.6
  Top w0.092: U1.73@-5.72,-1.3 -5.682,-1.338 -5.182,-1.338 v1(-5.144,-1.376) ; v1(-1.47,-14.829) -1.417,-14.882 -1.417,-14.983 U2.H9@-1.1,-15.3
  Inner3 w0.079: v1@-6.773,-7.171 -6.773,-4.619 -6.601,-4.447 -6.601,-4.306 -6.43,-4.135 -6.43,-3.283 -6.097,-2.95 -6.097,-2.723 -5.635,-2.261 -5.635,-1.868 v1(-5.144,-1.376) ; v1(-2.029,-7.232) -1.74,-7.521 -1.74,-8.701 -1.84,-8.801 -1.84,-9.105 -2.157,-9.422 -2.157,-10.305 -1.792,-10.67 -1.792,-11.703 -0.566,-12.929 -0.566,-13.517 -0.499,-13.584 -0.499,-14.215 -1.132,-14.848 -1.451,-14.848 v1(-1.47,-14.829)
  Inner4 w0.078: v1(-6.774,-7.172) -6.761,-7.185 -4.887,-7.185 -4.516,-7.185 -4.433,-7.268 -4.433,-7.309 -4.35,-7.392 -4.183,-7.392 -4.1,-7.309 -4.1,-7.202 -4.017,-7.119 -3.851,-7.119 -3.768,-7.202 -3.768,-7.309 -3.685,-7.392 -3.519,-7.392 -3.436,-7.309 -3.436,-7.202 -3.352,-7.119 -3.186,-7.119 -3.103,-7.202 -3.103,-7.309 -3.02,-7.392 -2.854,-7.392 -2.771,-7.309 -2.771,-7.268 -2.688,-7.185 -2.236,-7.185 -2.191,-7.185 -2.187,-7.189 -2.072,-7.189 v1(-2.029,-7.232)
DDR_D6: U1.109 U2.F1 | length 22.6
  Top w0.092: v1(-5.221,-11.698) -5.163,-11.698 -5,-11.862 -4.857,-11.862 -4.45,-12.268 -1.98,-12.268 -1.872,-12.375 -0.768,-12.375 0.051,-11.557 0.051,-9.349 U2.F1@0.5,-8.9 ; v1(1.518,-4.855) 1.518,-4.799 1.918,-4.398 2.053,-4.398 2.15,-4.302 U1.109@2.15,-3.8
  Inner3 w0.079: v1(-5.221,-11.698) -5.221,-10.912 -5.17,-10.861 -5.17,-10.114 -5.232,-10.051 -5.232,-8.938 -5.291,-8.88 -5.291,-8.377 -5.242,-8.329 -5.242,-7.083 -4.699,-6.54 -4.699,-6.484 -4.529,-6.313 v1(-4.529,-6.272)
  Inner4 w0.078: v1(-4.529,-6.272) -4.479,-6.272 -4.266,-6.059 -3.907,-6.059 -3.563,-5.715 -1.758,-5.715 -1.749,-5.724 0.754,-5.724 1.374,-5.104 1.374,-5.012 1.518,-4.868 v1(1.518,-4.855)
DDR_D7: U1.70 U2.F9 | length 24.3
  Top w0.092: v1(-7.138,-0.541) -7.134,-0.545 -6.605,-0.545 U1.70@-6.6,-0.55 ; U2.F9@0.508,-15.258 0.516,-15.258 0.838,-14.936 v1(0.838,-14.91)
  Inner3 w0.079: v1(0.498,-1.532) 0.807,-1.532 1.057,-1.783 1.057,-2.264 1.165,-2.371 1.165,-3.539 1.221,-3.595 1.221,-5.651 0.971,-5.901 0.971,-6.986 1.112,-7.127 1.112,-8.293 1.044,-8.361 1.044,-9.389 1.329,-9.673 1.329,-10.449 1.497,-10.618 1.497,-12.434 1.422,-12.509 1.422,-14.326 v1(0.838,-14.91)
  Inner4 w0.078: v1(-7.138,-0.541) -7.129,-0.55 -6.009,-0.55 -5.907,-0.448 -4.881,-0.448 -4.432,0.001 -1.101,0.001 -0.893,-0.207 -0.893,-0.494 -0.722,-0.665 -0.198,-0.665 0.466,-1.33 0.466,-1.5 v1(0.498,-1.532)
DDR_D8: U1.66 U2.C8 | length 24.3
  Top w0.092: v1(-7.091,0.387) -7.06,0.418 -6.632,0.418 U1.66@-6.6,0.45 ; v1(2.52,-14.039) 2.52,-14.079 2.9,-14.46 U2.C8@2.9,-14.5
  Inner3 w0.079: v1(1.198,-1.054) 1.218,-1.054 2.25,-2.087 2.25,-2.979 2.37,-3.098 2.37,-5.152 2.438,-5.221 2.438,-8.932 2.511,-9.004 2.511,-9.647 2.637,-9.773 2.813,-9.95 2.813,-13.745 v1(2.52,-14.039)
  Inner4 w0.078: v1(-7.091,0.387) -5.012,0.387 -4.9,0.498 -4.698,0.498 -4.648,0.549 0.121,0.549 0.807,-0.138 0.807,-0.421 1.169,-0.784 1.169,-1.026 v1(1.198,-1.054)
DDR_D9: U1.112 U2.C2 | length 22.8
  Top w0.092: U2.C2@2.9,-9.7 2.938,-9.738 2.938,-10.042 3.349,-10.453 3.349,-10.645 3.753,-11.049 4.103,-11.049 4.241,-10.91 v1(4.299,-10.91) ; U1.112@2.9,-2.92 2.9,-1.802 3.063,-1.639 3.063,-0.832 2.754,-0.523 2.754,-0.274 2.952,-0.076 3.412,-0.076 v1(3.435,-0.099)
  Inner3 w0.079: v1(3.435,-0.099) 3.435,-0.16 3.531,-0.256 3.531,-0.508 3.531,-0.547 3.614,-0.63 3.632,-0.63 3.715,-0.713 3.715,-0.88 3.632,-0.963 3.338,-0.963 3.255,-1.046 3.255,-1.213 3.338,-1.296 3.515,-1.296 3.598,-1.379 3.598,-1.545 3.515,-1.629 3.338,-1.629 3.255,-1.712 3.255,-1.878 3.338,-1.961 3.447,-1.961 3.531,-2.045 3.531,-2.413 3.575,-2.457 3.994,-2.877 3.994,-2.956 4.229,-3.191 4.229,-3.314 4.229,-3.354 4.312,-3.437 4.334,-3.437 4.417,-3.52 4.417,-3.686 4.334,-3.77 4.236,-3.77 4.153,-3.853 4.153,-4.019 4.236,-4.102 4.285,-4.102 4.368,-4.186 4.368,-4.352 4.285,-4.435 4.236,-4.435 4.153,-4.518 4.153,-4.685 4.236,-4.768 4.486,-4.768 4.569,-4.851 4.569,-5.017 4.486,-5.101 4.236,-5.101 4.153,-5.184 4.153,-5.35 4.236,-5.433 4.486,-5.433 4.569,-5.517 4.569,-5.683 4.486,-5.766 4.312,-5.766 4.229,-5.849 4.229,-7.312 4.349,-7.432 4.544,-7.628 4.544,-7.734 4.544,-8.106 4.461,-8.189 4.155,-8.189 4.072,-8.272 4.072,-8.439 4.155,-8.522 4.486,-8.522 4.569,-8.605 4.569,-8.772 4.486,-8.855 4.155,-8.855 4.072,-8.938 4.072,-9.104 4.155,-9.187 4.602,-9.187 4.685,-9.271 4.685,-9.437 4.602,-9.52 4.519,-9.52 4.436,-9.603 4.436,-9.77 4.519,-9.853 4.916,-9.853 4.999,-9.936 4.999,-10.103 4.916,-10.186 4.628,-10.186 4.544,-10.269 4.544,-10.54 4.544,-10.665 v1(4.299,-10.91)
DDR_D10: U1.68 U2.D7 | length 22.9
  Top w0.092: v1(-7.112,-0.07) -7.102,-0.06 -6.614,-0.06 U1.68@-6.604,-0.05 ; v1(1.716,-13.404) 1.76,-13.404 2.056,-13.7 U2.D7@2.1,-13.7
  Inner3 w0.079: v1(1.351,-1.947) 1.345,-1.953 1.345,-2.746 1.445,-2.846 1.445,-3.734 1.825,-4.114 1.825,-5.372 1.897,-5.445 1.897,-9.156 1.969,-9.229 1.969,-9.871 2.096,-9.997 2.272,-10.174 2.272,-12.847 v1(1.716,-13.404)
  Inner4 w0.078: v1(-7.112,-0.07) -7.068,-0.07 -6.87,-0.268 -4.956,-0.268 -4.499,0.189 -0.674,0.189 0.724,-1.21 0.724,-1.25 1.002,-1.527 1.244,-1.527 1.351,-1.634 v1(1.351,-1.947)
DDR_D11: U1.110 U2.D3 | length 23
  Top w0.092: U2.D3@2.116,-10.516 2.477,-10.877 2.477,-11.138 2.794,-11.455 3.186,-11.455 3.273,-11.542 3.273,-11.623 3.36,-11.709 3.533,-11.709 3.619,-11.623 3.619,-11.491 3.706,-11.404 3.879,-11.404 3.966,-11.491 3.966,-11.623 4.052,-11.709 4.225,-11.709 4.312,-11.623 4.312,-11.542 4.399,-11.455 4.642,-11.455 4.94,-11.455 v1(5.124,-11.271) ; U1.110@2.4,-2.92 2.4,-2.455 2.706,-2.149 2.706,-1.612 2.869,-1.449 2.869,-0.912 2.503,-0.546 2.503,0.42 v1(2.921,0.838)
  Inner3 w0.079: v1(2.921,0.838) 2.704,0.621 2.704,-0.568 2.972,-0.836 2.972,-0.914 2.972,-1.109 2.889,-1.192 2.828,-1.192 2.744,-1.275 2.744,-1.442 2.828,-1.525 2.889,-1.525 2.972,-1.608 2.972,-2.68 3.187,-2.896 3.207,-2.915 3.234,-2.943 3.352,-2.943 3.414,-2.881 3.532,-2.881 3.649,-2.998 3.649,-3.116 3.587,-3.178 3.587,-3.296 3.598,-3.306 3.626,-3.334 3.973,-3.681 3.973,-6.883 3.829,-7.026 3.819,-7.036 3.819,-9.68 3.958,-9.818 3.958,-10.369 4.005,-10.416 4.005,-11.041 4.235,-11.271 v1(5.124,-11.271)
DDR_D12: U1.111 U2.D1 | length 21.7
  Top w0.092: v1(-5.934,-8.046) -5.928,-8.04 -5.928,-6.586 v1(-5.911,-6.568) ; v1(1.423,-8.009) 1.832,-8.417 1.832,-8.632 1.997,-8.797 U2.D1@2.041,-8.797 ; U1.111@2.65,-3.8 2.667,-3.817 2.667,-4.642 v1(2.699,-4.674)
  Inner4 w0.078: v1(-5.934,-8.046) -5.92,-8.032 -5.92,-7.835 -5.657,-7.572 -1.872,-7.572 -1.575,-7.869 -1.334,-7.869 -1.09,-7.625 0.989,-7.625 1.372,-8.009 v1(1.423,-8.009) ; v1(-5.911,-6.568) -5.911,-6.586 -5.558,-6.939 -0.832,-6.939 -0.63,-6.738 1.424,-6.738 2.61,-5.551 2.61,-5.126 2.699,-5.038 v1(2.699,-4.674)
DDR_D13: U1.67 U2.D9 | length 23.4
  Top w0.092: U1.67@-5.72,0.2 -5.274,0.2 -5.099,0.025 v1(-5.092,0.025) ; v1(1.753,-14.961) 1.761,-14.961 U2.D9@2.1,-15.3
  Inner3 w0.079: v1(1.67,-2.29) 1.705,-2.325 1.705,-2.444 1.715,-2.453 1.715,-3.749 2.005,-4.039 2.005,-5.298 2.077,-5.37 2.077,-9.082 2.15,-9.154 2.15,-9.796 2.276,-9.922 2.453,-10.099 2.453,-12.933 2.08,-13.305 2.08,-13.528 2.222,-13.67 2.222,-14.491 v1(1.753,-14.961)
  Inner4 w0.078: v1(-5.092,0.025) -5.084,0.025 -4.856,0.253 -4.689,0.253 -4.574,0.369 0.046,0.369 0.627,-0.212 0.627,-0.496 0.904,-0.774 0.904,-1.175 1.076,-1.347 1.318,-1.347 1.678,-1.706 1.678,-2.283 v1(1.67,-2.29)
DDR_D14: U1.114 U2.B1 | length 23
  Top w0.092: v1(3.054,-0.398) 3.054,-0.406 3.4,-0.752 3.4,-1.033 3.4,-1.555 3.487,-1.642 3.518,-1.642 3.605,-1.729 3.605,-1.902 3.518,-1.988 3.216,-1.988 3.129,-2.075 3.129,-2.248 3.216,-2.335 3.313,-2.335 3.4,-2.421 3.4,-2.467 U1.114@3.4,-2.92 ; U2.B1@3.7,-8.9 4.122,-9.322 v1(4.978,-9.322)
  Inner3 w0.079: v1(3.054,-0.398) 3.031,-0.375 3.031,-0.088 3.314,0.194 3.557,0.194 3.809,-0.058 4.3,-0.058 4.597,-0.356 4.597,-0.457 4.597,-0.497 4.681,-0.58 4.76,-0.58 4.843,-0.663 4.843,-0.829 4.76,-0.913 4.427,-0.913 4.343,-0.996 4.343,-1.162 4.427,-1.245 4.76,-1.245 4.843,-1.329 4.843,-1.495 4.76,-1.578 4.427,-1.578 4.343,-1.661 4.343,-1.828 4.427,-1.911 4.76,-1.911 4.843,-1.994 4.843,-2.16 4.76,-2.244 4.527,-2.244 4.444,-2.327 4.444,-2.493 4.527,-2.576 4.76,-2.576 4.843,-2.66 4.843,-2.826 4.76,-2.909 4.664,-2.909 4.581,-2.992 4.581,-3.159 4.664,-3.242 4.76,-3.242 4.843,-3.325 4.843,-3.492 4.76,-3.575 4.681,-3.575 4.597,-3.658 4.597,-3.785 4.597,-3.835 4.978,-4.216 4.978,-4.394 4.978,-4.637 4.895,-4.721 4.833,-4.721 4.75,-4.804 4.75,-4.97 4.833,-5.053 5.063,-5.053 5.146,-5.137 5.146,-5.303 5.063,-5.386 4.833,-5.386 4.75,-5.469 4.75,-5.636 4.833,-5.719 5.083,-5.719 5.166,-5.802 5.166,-5.969 5.083,-6.052 4.846,-6.052 4.763,-6.135 4.763,-6.301 4.846,-6.385 5.054,-6.385 5.138,-6.468 5.138,-6.634 5.054,-6.717 4.912,-6.717 4.829,-6.801 4.829,-6.967 4.912,-7.05 5.241,-7.05 5.324,-7.133 5.324,-7.3 5.241,-7.383 4.887,-7.383 4.804,-7.466 4.804,-7.632 4.887,-7.716 5.241,-7.716 5.324,-7.799 5.324,-7.965 5.241,-8.048 4.833,-8.048 4.75,-8.132 4.75,-8.298 4.833,-8.381 4.961,-8.381 5.044,-8.464 5.044,-8.631 4.961,-8.714 4.833,-8.714 4.75,-8.797 4.75,-8.964 4.833,-9.047 4.895,-9.047 4.978,-9.13 4.978,-9.169 v1(4.978,-9.322)
DDR_D15: U1.65 U2.B9 | length 24.2
  Top w0.092: U1.65@-5.72,0.7 -5.712,0.691 -5.139,0.691 v1(-5.13,0.683) ; v1(3.353,-14.986) 3.369,-14.986 3.683,-15.3 U2.B9@3.7,-15.3
  Inner3 w0.079: v1(1.655,-1.054) 1.676,-1.075 1.676,-1.258 2.431,-2.012 2.431,-2.904 2.738,-3.211 2.738,-4.298 2.992,-4.552 2.992,-4.795 2.83,-4.957 2.782,-4.957 2.619,-5.12 2.619,-8.518 2.691,-8.591 2.691,-9.572 2.817,-9.698 2.994,-9.875 2.994,-10.294 3,-10.301 3,-13.148 3.581,-13.73 3.581,-14.757 v1(3.353,-14.986)
  Inner4 w0.078: v1(-5.13,0.683) -5.084,0.683 -4.971,0.796 0.214,0.796 1.017,-0.007 1.221,-0.007 1.627,-0.413 1.627,-1.027 v1(1.655,-1.054)
DDR_LDM: U1.108 U2.F3 | length 22.9
  Top w0.092: U2.F3@0.5,-10.5 0.852,-10.852 1.076,-10.852 2.18,-11.956 4.412,-11.956 4.582,-11.786 v1(5.232,-11.786) ; U1.108@1.9,-2.92 1.927,-2.893 1.927,-2.487 2.512,-1.902 2.512,-1.526 2.569,-1.47 v1(2.569,-1.036)
  Inner3 w0.079: v1(2.569,-1.036) 2.564,-1.041 2.564,-1.517 2.791,-1.744 2.791,-2.755 3.051,-3.014 3.202,-3.165 3.386,-3.349 3.386,-3.449 3.386,-5.632 3.469,-5.715 3.63,-5.715 3.714,-5.799 3.714,-5.965 3.63,-6.048 3.243,-6.048 3.16,-6.131 3.16,-6.298 3.243,-6.381 3.63,-6.381 3.714,-6.464 3.714,-6.63 3.63,-6.714 3.243,-6.714 3.16,-6.797 3.16,-6.963 3.243,-7.046 3.483,-7.046 3.566,-7.13 3.566,-7.296 3.483,-7.379 3.243,-7.379 3.16,-7.462 3.16,-7.629 3.243,-7.712 3.483,-7.712 3.566,-7.795 3.566,-7.962 3.483,-8.045 3.243,-8.045 3.16,-8.128 3.16,-8.294 3.243,-8.378 3.303,-8.378 3.386,-8.461 3.386,-8.5 3.386,-8.53 3.638,-8.783 3.638,-9.754 3.761,-9.877 3.761,-10.427 3.825,-10.491 3.825,-11.298 4.312,-11.786 v1(5.232,-11.786)
DDR_LDQS: U1.113 U2.F7 | length 22
  Top w0.092: v1(0.203,-13.31) 0.203,-13.353 0.508,-13.658 U2.F7@0.508,-13.665 ; v1(2.912,-5.25) 2.912,-5.248 3.15,-5.01 U1.113@3.15,-3.8
  Inner3 w0.079: v1(2.912,-5.25) 2.871,-5.291 2.871,-5.91 2.799,-5.982 2.799,-8.444 2.871,-8.516 2.871,-9.497 2.998,-9.624 3.174,-9.8 3.174,-10.22 3.645,-10.69 3.645,-10.959 3.645,-11.373 3.989,-11.717 3.989,-11.835 3.732,-12.092 3.732,-12.21 3.85,-12.327 3.967,-12.327 4.27,-12.025 4.387,-12.025 4.505,-12.142 4.505,-12.26 4.203,-12.563 4.203,-12.68 4.32,-12.798 4.438,-12.798 4.695,-12.541 4.812,-12.541 4.84,-12.569 4.895,-12.624 v1(5.156,-12.624)
  Inner4 w0.078: v1(0.203,-13.31) 0.402,-13.111 0.546,-13.111 0.585,-13.111 0.668,-13.027 0.668,-12.923 0.751,-12.84 0.917,-12.84 1,-12.923 1,-13.381 1.083,-13.464 1.25,-13.464 1.333,-13.381 1.333,-13.194 1.416,-13.111 2.579,-13.111 2.662,-13.027 2.662,-12.611 2.745,-12.528 2.912,-12.528 2.995,-12.611 2.995,-13.381 3.078,-13.464 3.244,-13.464 3.327,-13.381 3.327,-12.611 3.41,-12.528 3.576,-12.528 3.66,-12.611 3.66,-13.027 3.743,-13.111 3.902,-13.111 4.144,-13.352 4.353,-13.561 4.845,-13.561 5.156,-13.25 v1(5.156,-12.624)
DDR_ODT: U1.74 U2.K9 | length 23.3
  Top w0.092: v1(-7.214,-1.988) -7.214,-1.676 -7.087,-1.55 U1.74@-6.6,-1.55 ; v1(-2.692,-15.773) -2.696,-15.77 -2.696,-15.269 U2.K9@-2.692,-15.265
  Inner3 w0.079: v1(-8.504,-14.478) -8.504,-14.135 -8.504,-14.095 -8.587,-14.012 -8.674,-14.012 -8.758,-13.929 -8.758,-13.763 -8.674,-13.679 -8.544,-13.679 -8.46,-13.596 -8.46,-13.43 -8.544,-13.347 -8.674,-13.347 -8.758,-13.263 -8.758,-13.097 -8.674,-13.014 -8.587,-13.014 -8.504,-12.931 -8.504,-12.45 -8.504,-12.287 -8.009,-11.792 -8.009,-8.644 -7.629,-8.264 -7.629,-6.58 -7.341,-6.291 -7.341,-4.421 -7.255,-4.336 -7.255,-4.183 -7.157,-4.085 -7.117,-4.045 -7.117,-3.928 -7.201,-3.844 -7.257,-3.844 -7.341,-3.761 -7.341,-3.595 -7.257,-3.512 -7.054,-3.512 -6.971,-3.428 -6.971,-3.262 -7.054,-3.179 -7.265,-3.179 -7.348,-3.096 -7.348,-2.929 -7.265,-2.846 -7.054,-2.846 -6.971,-2.763 -6.971,-2.283 -6.971,-2.184 -7.167,-1.988 v1(-7.214,-1.988)
  Inner4 w0.078: v1(-8.504,-14.478) -7.728,-15.254 -6.582,-15.254 -6.255,-14.927 -5.213,-14.927 -4.205,-15.934 -3.716,-15.934 -3.292,-15.51 -2.955,-15.51 v1(-2.692,-15.773)
DDR_RAS: U1.81 U2.K7 | length 22.4
  Top w0.092: v1(-6.106,-3.449) -6.111,-3.454 -6.111,-4.072 -5.783,-4.4 -5,-4.4 -4.85,-4.25 U1.81@-4.85,-3.8 ; U2.K7@-2.7,-13.7 -2.7,-13.785 -2.509,-13.976 -2.509,-14.178 -2.251,-14.437 -2.251,-14.841 v1(-2.212,-14.88)
  Inner3 w0.079: v1(-3.054,-2.107) -3.054,-3.315 -3.153,-3.415 -3.153,-4.653 -3.017,-4.79 -3.017,-5.425 -3.09,-5.498 -3.09,-6.877 -2.952,-7.015 -2.952,-10.531 -2.606,-10.877 -2.606,-12.743 -2.695,-12.832 -2.695,-14.44 -2.255,-14.88 v1(-2.212,-14.88)
  Inner4 w0.078: v1(-6.106,-3.449) -6.09,-3.465 -5.421,-3.465 -5.382,-3.465 -5.299,-3.381 -5.299,-3.182 -5.215,-3.099 -5.049,-3.099 -4.966,-3.182 -4.966,-3.381 -4.883,-3.465 -4.717,-3.465 -4.634,-3.381 -4.634,-3.182 -4.551,-3.099 -4.384,-3.099 -4.301,-3.182 -4.301,-3.381 -4.218,-3.465 -3.671,-3.465 -3.612,-3.465 -3.054,-2.906 v1(-3.054,-2.107)